# Altium PCB G_Humi_PCB.PcbDoc
Units mm, origin at the board's own origin, x right, y up, seen from the top; angles counter-clockwise.
Board outline 18.5 x 73 mm, 2 copper layers (Top Layer, Bottom Layer), stack 1.571 mm thick; 11 components, 7 nets, 31 pads, 6 vias.
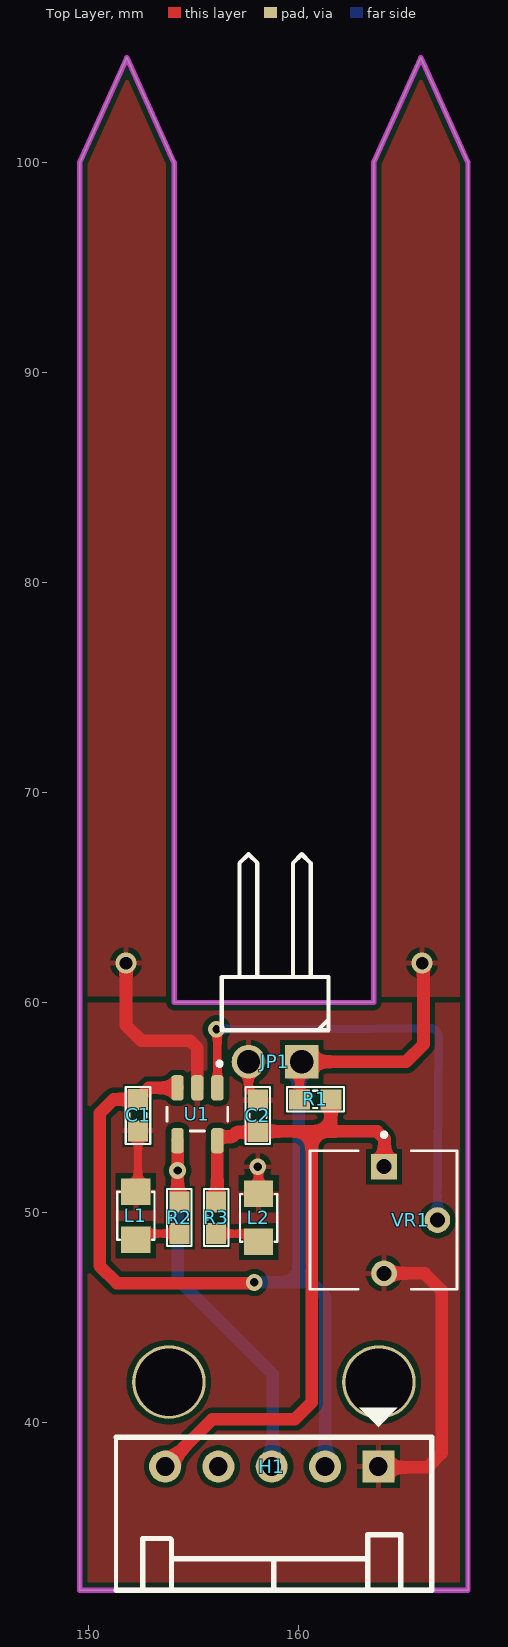
[diagram p0: Top Layer view]
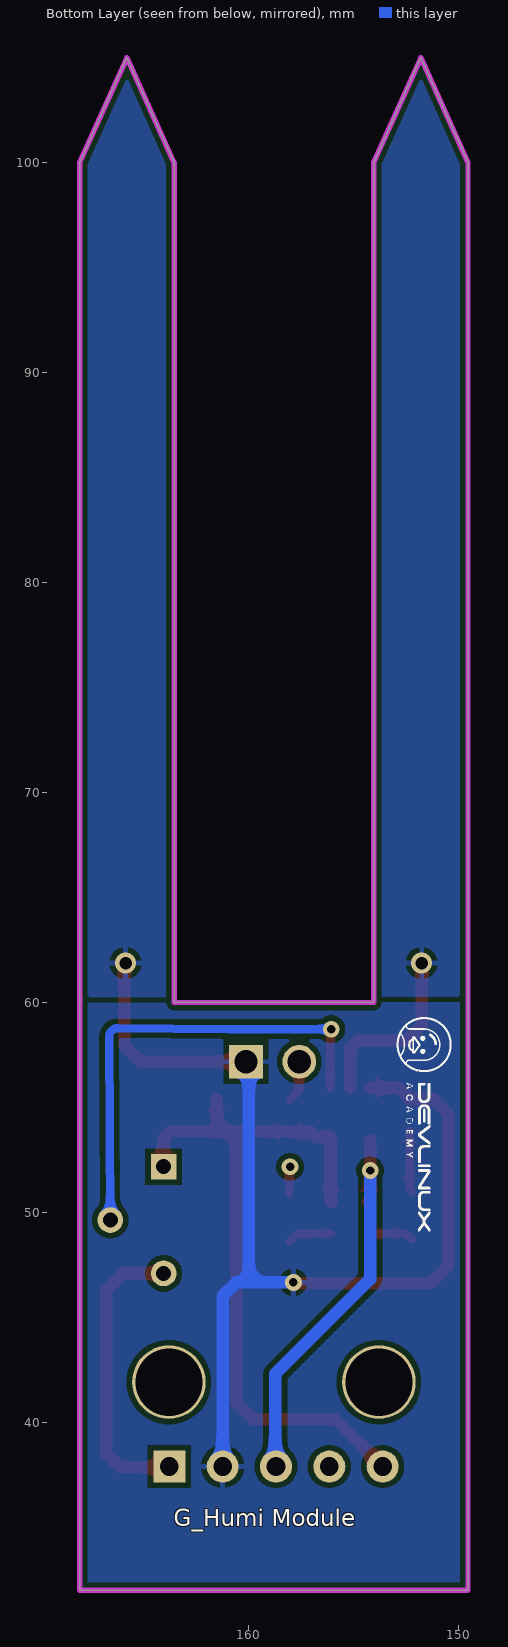
[diagram p1: Bottom Layer view, seen from below]
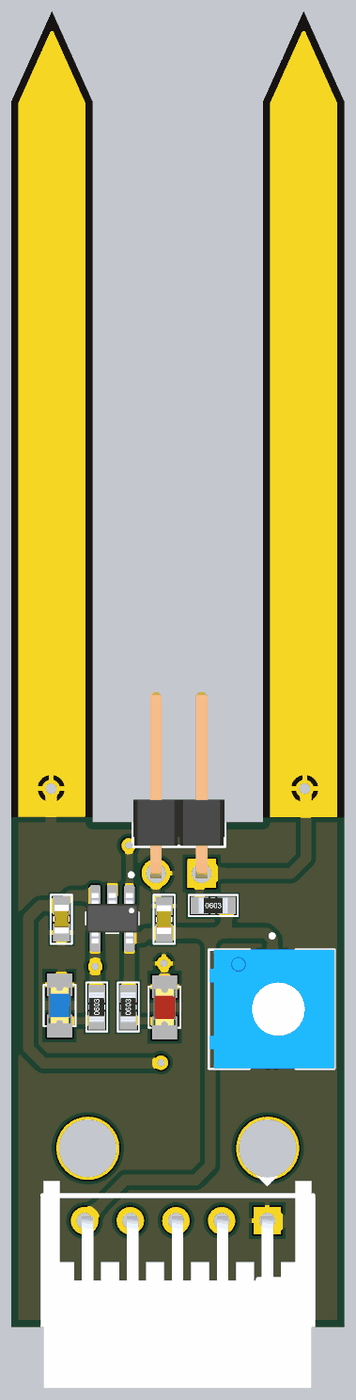
[diagram p2: 3D render of the assembled board from above, using the file's embedded part models]

## Layer stack, top to bottom
Top Solder: solder mask 0.0102, Solder Resist, Dk 3.5
Top Layer: signal copper 0.0356
Dielectric 1: dielectric 1.5, FR-4, Dk 4.8
Bottom Layer: signal copper 0.0356
Bottom Solder: solder mask 0.0102, Solder Resist, Dk 3.5

## Board outline
149.561,32.004 149.561,100.004 151.811,105.004 154.061,100.004 154.061,60.004 163.561,60.004 163.561,100.004 165.811,105.004 168.061,100.004 168.061,32.004

## Design rules (kind name [scope] priority, off if disabled: settings)
Clearance [All] p1: gap=0.254 ignorepadtopadclearanceinfootprint=FALSE except(0: Arc-Hole Track-Hole SMDPad-Hole THPad-Hole Via-Hole Fill-Hole Poly-Hole Region-Hole Text-Hole)
PolygonConnect [All] p1: connectstyle=Relief reliefconductorwidth=0.254 reliefentries=4 polygonreliefangle="90 Angle" airgapwidth=0.254
RoomDefinition G_Humi_SCH [InComponentClass('G_Humi_SCH')] p1: confinementstyle=ConfineIn formatcopy=TRUE lockcomponents=FALSE outline 178.943,26.924 236.22,26.924 236.22,45.085 178.943,45.085
RoutingVias [All] p1: holewidth=0.4 width=0.8 viastyle="Through Hole" minholewidth=0.3 minwidth=0.6 maxholewidth=0.5 maxwidth=1
SolderMaskExpansion [All] p1: expansion=0.102 istentingtop=FALSE
Width [All] p1: maxlimit=0.6 minlimit=0.254 preferedwidth=0.4
30 further rules are at their usual default settings.

## Components (designator, comment, footprint, x,y, rotation, side; value= is the part's Value field where it differs from the comment)
C1 "100nF" "tu 0603" 152.34,54.64 r270 top
C2 "100nF" "tu 0603" 158.05,54.615 r90 top
H1 "Header 5P 2.54 Duc Cong" "Header 5P DC 2.54" 163.79,37.9 r270 top
JP1 "JP 1x2 2.54" "JP 1x2 DC" 160.14,57.18 r180 top
L1 "LED BLUE" LED-0805-Blue 152.24,48.704 r90 top
L2 "LED RED" LED-0805-Red 158.08,48.604 r90 top
R1 "10k" "tro smd 0603" 160.78,55.39 r0 top
R2 "1k" "tro smd 0603" 154.31,49.75 r90 top
R3 "1k" "tro smd 0603" 156.06,49.75 r90 top
U1 "LM321MF" SOT95P280X145-5N 155.17,54.68 r270 top
VR1 "10k" TRIM_3362P-1-102 164.06,49.64 r270 top

## Footprints (in the part's own frame and the unit in brackets; to place one, negate y for a bottom-side part, rotate by r counter-clockwise, add the part's x,y. Pads: shape width x height; smd on the part's side, far side on the other; paste and mask are expansions set on the pad)
"Header 5P DC 2.54" [mil]
  rect 60x60 hole 35: 1(0,0)
  round 60 hole 35: 2(0,-100) 3(0,-200) 4(0,-300) 5(0,-400)
  silkscreen extent -110,-492 232,100, body extent -87,-490 366,97, height 240
"JP 1x2 DC" [mm] "JP 1x2 DC"
  rect 1.6x1.6 hole 1.1: 1(0,0)
  round 1.6 hole 1.1: 2(2.54,0)
  silkscreen extent -1.27,-9.88 3.81,-1.5, body extent -1.27,-10.06 3.81,0.3, height 2.55
LED-0805-Blue [mil]
  rect 50x55 smd: 1(0,0) 2(90,0)
  silkscreen extent 0,-35 90,35, body extent 5,-25 85,25, height 43
LED-0805-Red [mil]
  rect 50x55 smd: 1(0,0) 2(90,0)
  silkscreen extent 0,-35 90,35, body extent 5,-25 85,25, height 43
SOT95P280X145-5N [mm]
  rrect50% 1.21x0.59 smd: 1(-1.255,0.95) 2(-1.255,0) 3(-1.255,-0.95) 4(1.255,-0.95) 5(1.255,0.95)
  silkscreen extent -2.51,-1.45 0.8,1.45, body extent -1.4,-1.45 1.4,1.45, height 1.45
TRIM_3362P-1-102 [mm]
  rect 1.222x1.222 / inner round 1.222 / far side rect 1.222x1.222 hole 0.714: 1(-2.54,0)
  round 1.222 hole 0.714: 2(0,2.54) 3(2.54,0)
  silkscreen extent -4.16,-3.53 3.3,3.47, body extent -3.3,-3.49 3.3,3.49, height 4.88
"tro smd 0603" [mm] "Chip Capacitor, 2-Leads, Body 1,60x0,80mm, IPC Medium Density"
  rect 1x0.95 smd mask+0.076: 1(-0.75,0) 2(0.75,0)
  silkscreen extent -1.35,-0.58 1.37,0.58, body extent -0.82,-0.42 0.82,0.43, height 0.44
"tu 0603" [mm] "Chip Capacitor, 2-Leads, Body 1,60x0,80mm, IPC Medium Density"
  rect 1x0.95 smd mask+0.076: 1(-0.75,0) 2(0.75,0)
  silkscreen extent -1.35,-0.58 1.37,0.58, body extent -0.8,-0.4 0.8,0.4, height 0.9

## Part data
C1 C2: library part "Tu 0603 104 50V 10%", "Dán", Chung_Loai=Dán, Don_Vi=Con, Ma_Hang=MH004568, So_Chan=2, Ten_Linh_Kien="Tụ 0603 104-100nF 10% 50V"
H1: "Cắm", Chung_Loai=Cắm, Don_Vi=Con, Ma_Hang=MH001308, Ten_Linh_Kien="Header 5P XH2.54-5P Đực Cong"
JP1: library part "JP 1x2 2.54 Duc Cong", "Cắm", Chung_Loai=Cắm, Don_Vi=Con, Ma_Hang=MH000904, Ten_Linh_Kien="Jump Đơn Đực 2.54MM 1x40P Cong Đứng"
L1: library part "LED 0805 Xanh Duong", "Dán", Chung_Loai=Dán, Don_Vi=Con, Ma_Hang=MH002327, Ten_Linh_Kien="LED 0805 Màu Xanh Dương (Blue)"
L2: library part "LED 0805 Do", "Dán", Chung_Loai=Dán, Don_Vi=Con, Ma_Hang=MH000897, Ten_Linh_Kien="LED 0805 Màu Đỏ (Red)"
R1: library part "Tro 0603 1% 10k", "Dán", Chung_Loai=Dán, Don_Vi=Con, Ma_Hang=MH006333, So_Chan=2, Ten_Linh_Kien="Trở 0603 1% 10k"
R2 R3: library part "Tro 0603 1% 1k", "Dán", Chung_Loai=Dán, Don_Vi=Con, Ma_Hang=MH006334, So_Chan=2, Ten_Linh_Kien="Trở 0603 1% 1k"
U1: "Low Power Single Op Amp 5-SOT-23 -40 to 85", Package="SOT-23-5 Texas Instruments", Check_prices=https://www.snapeda.com/parts/LM321MF/Texas+Instruments/view-part/?ref=eda, MF="Texas Instruments", MP=LM321MF, SnapEDA_Link=https://www.snapeda.com/parts/LM321MF/Texas+Instruments/view-part/?ref=snap
VR1: library part "Bien tro vuong", "TRIMMER - 1/4in SQ ST CERMET", Package="3362P-1 Bourns Inc.", Check_prices=https://www.snapeda.com/parts/3362P-1-102/Bourns/view-part/?ref=eda, MF=Bourns, MP=3362P-1-102, SnapEDA_Link=https://www.snapeda.com/parts/3362P-1-102/Bourns/view-part/?ref=snap

## Free pads (board coordinates)
  round 3.5 hole 3.2: 2(153.811,41.919) 2(163.811,41.919)

## Via types
v1: diameter 0.8, hole 0.4, Top Layer to Bottom Layer, 4 vias
v2: diameter 1, hole 0.6, Top Layer to Bottom Layer, 2 vias

## Nets (pads, with @x,y where several pads share a name; then routed paths per layer and width w, separated by ;. In a path a pad name is that pad's centre, name@x,y a point inside that pad or via, vN(x,y) a via of type N, cw(c..) or ccw(c..) an arc to the next point about the centre after c; other vN are vias at no path point)
+5: C2.1 H1.5 R1.2 R3.2 U1.5 VR1.1 | length 35.4
  Top Layer w0.6: H1.5 155.89,40.16 159.81,40.16 160.61,40.96 160.61,53.865 ; R3.2 156.115,50.555 156.115,53.42 U1.5 156.12,53.604 156.125,53.609 156.829,53.609 157.043,53.823 158.009,53.823 C2.1 160.61,53.865 ; R1.2 161.53,53.865 ; VR1.1 164.08,52.2 164.08,53.513 163.729,53.865 161.81,53.865 161.53,53.865 ; 160.61,53.865 161.53,53.865
A_OUT: C1.1 H1.2 JP1.1 R1.1 U1.3 | length 53.5
  Top Layer w0.4: R1.1 160.03,57.07 JP1.1@160.075,57.115
  Top Layer w0.6: U1.3 152.86,55.935 152.34,55.415 C1.1 151.18,55.39 150.51,54.72 150.51,47.46 151.33,46.64 157.85,46.64 v1(157.88,46.67) ; JP1.1 165.11,57.18 165.94,58.01 165.94,61.81 v2(165.873,61.877)
  Bottom Layer w0.6: v1(157.88,46.67) 160,46.67 ; JP1.1@160,57.41 160,46.67 ; H1.2 161.25,46.02 160.6,46.67 160,46.67
D_OUT: H1.3 R2.2 U1.4 | length 19
  Top Layer w0.6: U1.4 154.225,53.42 v1(154.225,52.003) 154.225,50.585 R2.2
  Bottom Layer w0.6: v1(154.225,52.003) 154.225,46.835 158.75,42.31 158.75,37.94 H1.3
GND: C1.2 C2.2 H1.1 JP1.2 L1.2 L2.2 U1.2 VR1.3 | length 28.9
  Top Layer w0.4: L1.2 152.34,51.09 C1.2 ; JP1.2 157.6,55.84 158.05,55.39 C2.2 ; v1(158.04,52.18) 158.08,52.14 L2.2
  Top Layer w0.6: v2@151.77,61.7 151.77,58.91 152.5,58.18 154.819,58.18 155.17,57.829 U1.2 ; H1.1 163.83,37.86 166.12,37.86 166.8,38.54 166.8,46.29 165.99,47.1 VR1.3
  other v2: 151.77,61.877
NetL1_1: L1.1 R2.1 | length 2.2
  Top Layer w0.381: L1.1 152.536,49 R2.1
NetL2_1: L2.1 R3.1 | length 2.2
  Top Layer w0.381: R3.1 157.684,49 L2.1
NetU1_1: U1.1 VR1.2 | length 22.4
  Top Layer w0.4: v1(156.08,58.73) 156.12,58.69 U1.1
  Bottom Layer w0.4: v1(156.08,58.73) 160.956,58.73 166.254,58.776 cw(c166.257,58.376) 166.657,58.374 VR1.2
pads on no net: H1.4

## Polygon pours and split planes (outlines as drawn)
GND on Top Layer "NONET_L-01_P-001" (solid, remove dead copper, pour order 8): 151.81,105.01 154.06,100 154.06,60.305 149.56,60.305 149.56,100
A_OUT on Top Layer "NONET_L-01_P-001" (solid, remove dead copper, pour order 7): 165.81,104.99 168.06,100 168.06,60.28 163.56,60.28 163.56,100
GND on Top Layer "NONET_L-01_P-001" (solid, remove dead copper, pour order 6): 149.56,60 168.06,60 168.06,32.01 149.56,32.01
GND on Bottom Layer "NONET_L-01_P-001" (solid, remove dead copper, pour order 5): 151.81,105 154.06,102.75 154.06,60.274 149.56,60.266 149.56,100.01
A_OUT on Bottom Layer "NONET_L-01_P-001" (solid, remove dead copper, pour order 3): 165.81,105 168.06,100.01 168.06,60.255 163.56,60.265 163.56,100
A_OUT on Bottom Layer "NONET_L-01_P-001" (solid, remove dead copper, pour order 4): 154.06,60.01 168.06,60 168.06,32 149.56,32 149.56,60.002

## Keep-outs
Keep-Out Layer:
  lines w0.254: 149.561,32.004 168.061,32.004 168.061,60.004 168.061,100.004 165.811,105.004 163.561,100.004 163.561,60.004 154.061,60.004 154.061,100.004 151.811,105.004 149.561,100.004 149.561,60.004 149.561,32.004

## Silkscreen, mask and mechanical layers (free items; w line width, h text height)
Bottom Overlay:
  drawing of 21 lines, arcs and shapes, not listed
  text "G_Humi Module" at 163.58,35.063 h0.8
Top Solder:
  region: 165.81,105 168.06,100.01 168.06,60.255 163.56,60.265 163.56,100.01
  region: 151.81,105.01 154.06,100 154.06,60.28 149.56,60.28 149.56,100
Bottom Solder:
  region: 151.81,105.01 154.06,100.01 154.06,60.27 149.56,60.26 149.56,100
  region: 165.81,105 168.06,100 168.06,60.26 163.56,60.27 163.56,100